# Altium PCB WPT Round 2 TX Layout.PcbDoc (part 2 of 2)
Units mm, origin at the board's own origin, x right, y up, seen from the top; angles counter-clockwise.
Board outline 82 x 80 mm, 4 copper layers (Top Layer, Ground 1, Ground 2, Bottom Layer), stack 0.603 mm thick; 124 components, 48 nets, 304 pads, 238 vias.
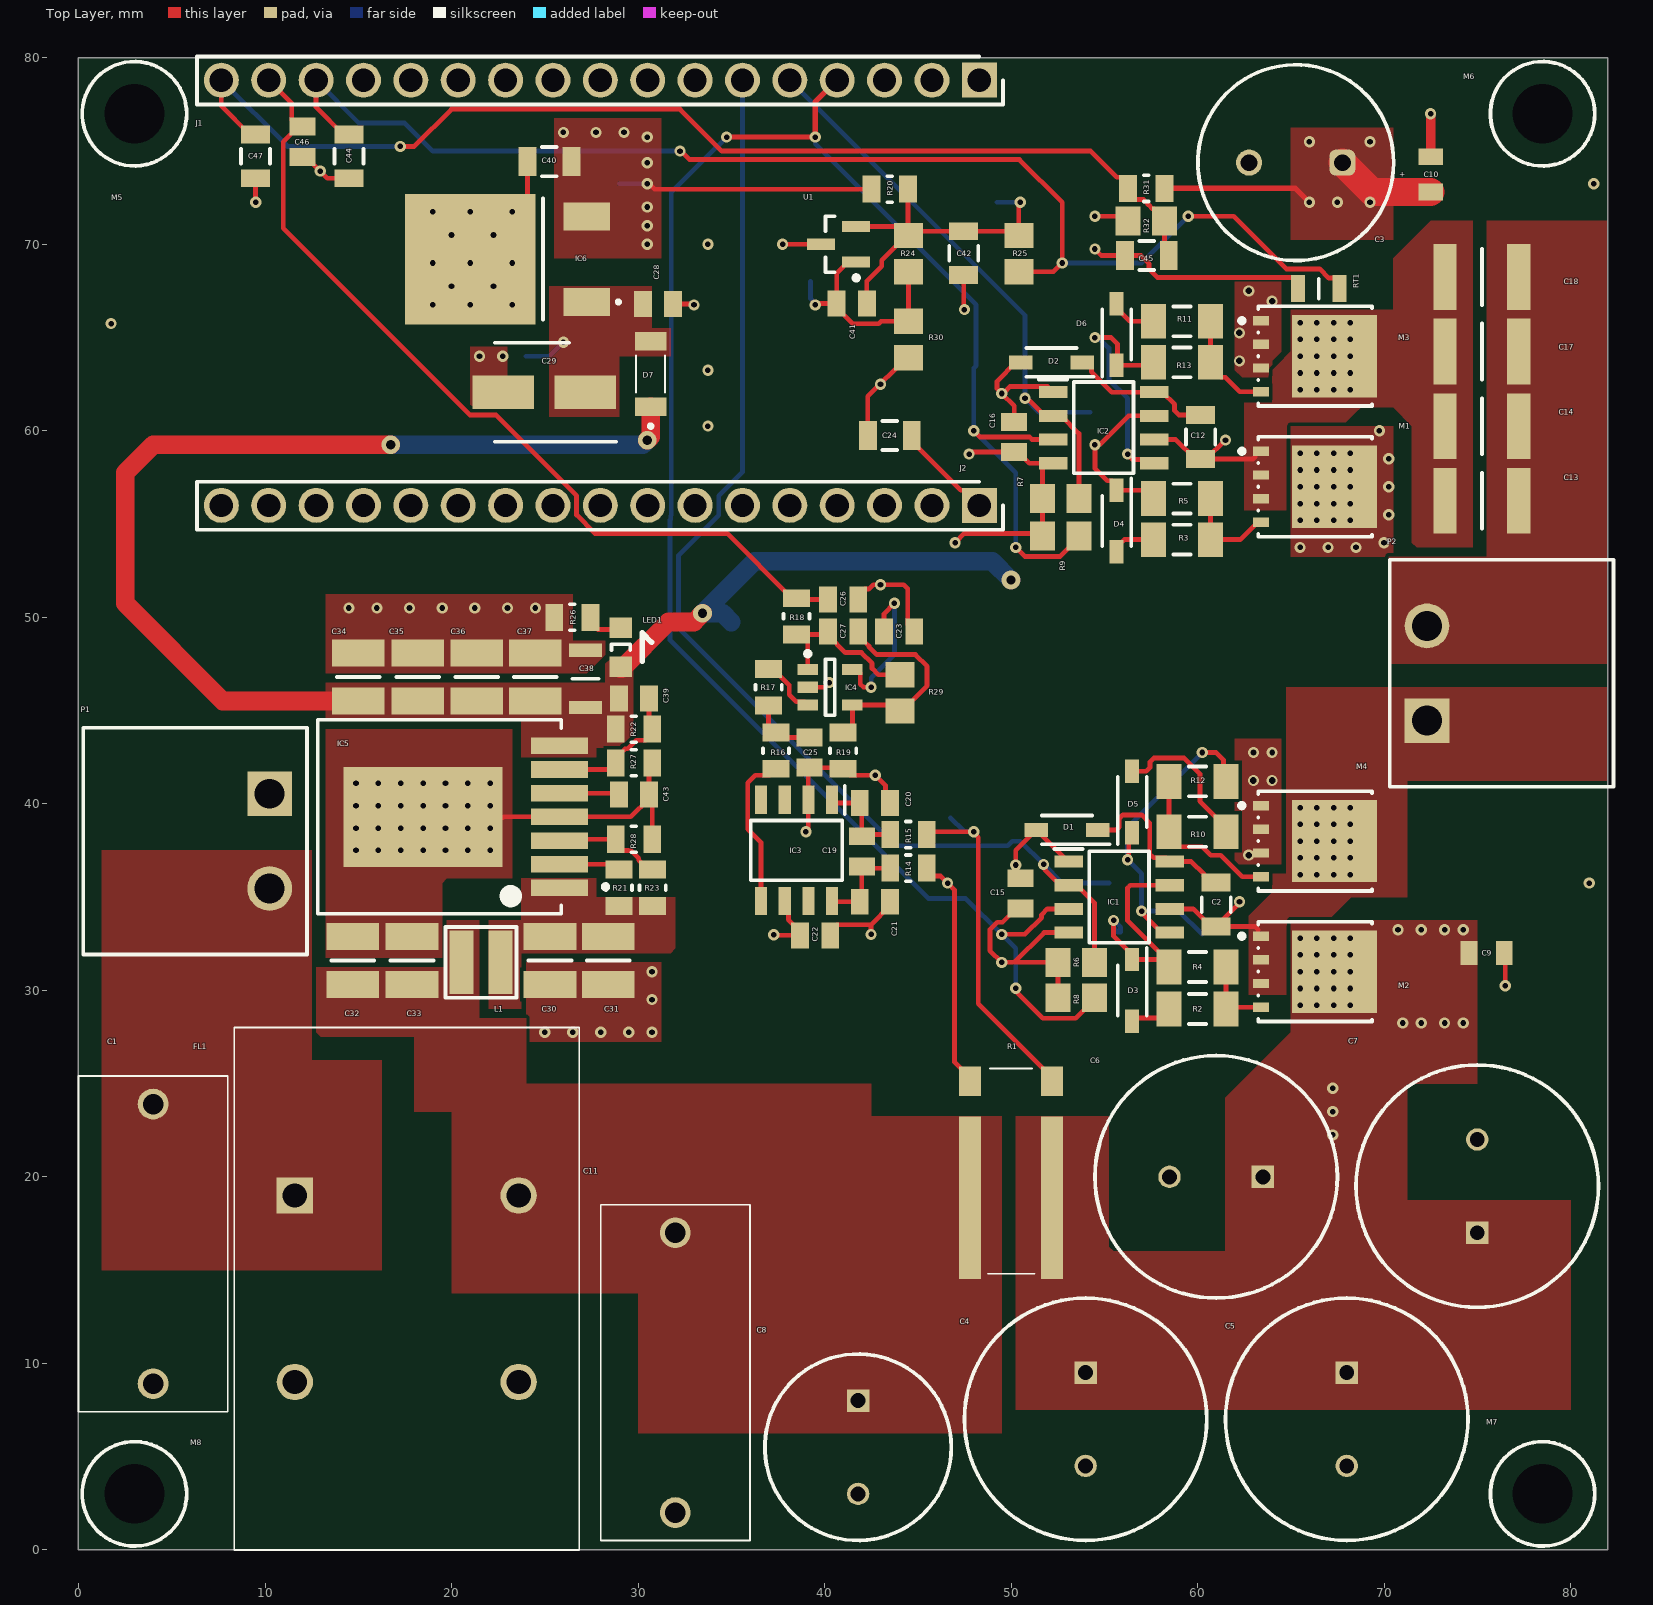
[diagram p0: Top Layer view]

## Polygon pours and split planes (outlines as drawn) (continued)
"Vin -" on Top Layer "VIN_-_L01_P006" (solid, remove dead copper, pour order 6): 65,33.75 75,33.75 75,25 71.25,25 71.25,22.5 61.5,22.5 61.5,24.25 65,27.75
NetC2_1 on Top Layer "NETC2_1_L01_P005" (solid, remove dead copper, pour order 5): 82,46.25 82,41.25 71.25,41.25 71.25,35 64.75,35 64.75,46.25
NetC13_1 on Top Layer "NETC13_1_L01_P004" (solid, remove dead copper, pour order 4): 82,71.25 82,47.5 70.25,47.5 70.25,53.25 75.5,53.25 75.5,71.25
"Vin -" on Top Layer "VIN_-_L01_P002" (solid, remove dead copper, pour order 2): 50.25,23.25 55.25,23.25 55.25,16.25 55.5,16 61.5,16 61.5,22.5 71.25,22.5 71.25,18.75 80,18.75 80,7.5 50.25,7.5
"DCDC Input Unfiltered" on Top Layer "DCDC_INPUT_UNFILTERED_L01_P001" (solid, remove dead copper, pour order 1): 20,25 42.5,25 42.5,23.25 49.5,23.25 49.5,6.25 30,6.25 30,13.75 20,13.75
P+ on Top Layer "P+_L01_P000" (solid, remove dead copper, pour order 0): 1.25,37.5 12.5,37.5 12.5,26.25 16.25,26.25 16.25,15 1.25,15
GND on Bottom Layer "GND_L04_P025" (solid, remove dead copper, pour order 25): 0,80 59.75,80 59.75,68.25 53.25,68.25 53.25,68.19 50.81,65.75 48.5,65.75 48.5,28 40,28 40,0 0,0
GND on Bottom Layer "GND_L04_P024" (solid, remove dead copper, pour order 24): 43.75,0 82,0 82,80 60,80 60,68 53.5,68 51,65.5 48.75,65.5 48.75,57.75 49.75,56.75 49.75,54.75 48.75,53.75 48.75,27.5 43.75,27.5
"Vin -" on Bottom Layer "VIN_-_L04_P012" (solid, remove dead copper, pour order 12): 65,76.25 75,76.25 75,27.5 69.25,27.5 69.25,52.5 65,52.5 65,60.75 71.25,60.75 71.25,68.75 65,68.75
P- on Bottom Layer "P-_L04_P003" (solid, remove dead copper, pour order 3): 0,45 12.5,45 12.5,26.25 16.25,26.25 16.25,0 0,0
5V on Ground 2 (split plane): 59.898,79.49 59.898,68.102 53.5,68.102 53.461,68.094 53.428,68.072 50.942,65.586 48.766,65.586 48.727,65.578 48.694,65.556 48.678,65.54 48.656,65.507 48.648,65.468 48.648,57.75 48.656,57.711 48.678,57.678 49.648,56.708 49.648,54.792 48.678,53.822 48.656,53.789 48.648,53.75 48.648,33.791 48.628,33.762 48.621,33.723 48.628,33.684 48.65,33.65 48.684,33.628 48.723,33.621 52.148,33.621 52.148,28.042 51.708,27.602 43.25,27.602 43.211,27.594 43.178,27.572 43.156,27.539 43.148,27.5 43.148,23.25 43.148,0.51 0.51,0.51 0.51,79.49
GND on Ground 2 (split plane): 23.148,36.602 14.102,36.602 14.102,42.148 23.148,42.148
GND on Ground 2 (split plane): 81.49,79.49 81.49,0.51 43.352,0.51 43.352,23.25 43.352,27.398 51.75,27.398 51.789,27.406 51.822,27.428 52.322,27.928 52.344,27.961 52.352,28 52.352,51.25 52.344,51.289 52.322,51.322 51.102,52.542 51.102,65.406 51.111,65.412 51.133,65.445 51.141,65.484 51.139,65.495 53.542,67.898 60,67.898 60.039,67.906 60.072,67.928 60.094,67.961 60.102,68 60.102,79.49
12V on Ground 2 (split plane): 50.898,52.5 50.906,52.461 50.928,52.428 52.148,51.208 52.148,33.824 48.852,33.824 48.852,53.708 49.822,54.678 49.844,54.711 49.852,54.75 49.852,56.75 49.844,56.789 49.822,56.822 48.852,57.792 48.852,65.382 50.898,65.382
"Vin -" on Ground 2 (split plane): 70.398,62.75 70.398,33.75 70.398,18.352 61.602,18.352 61.602,24.208 65.072,27.678 65.094,27.711 65.102,27.75 65.102,76.148 70.398,76.148
GND on Ground 1 (split plane): 59.898,79.49 59.898,68.102 53.5,68.102 53.461,68.094 53.428,68.072 50.928,65.572 50.906,65.539 50.898,65.5 50.898,52.5 50.906,52.461 50.928,52.428 52.148,51.208 52.148,28.042 51.708,27.602 43.25,27.602 43.211,27.594 43.178,27.572 43.156,27.539 43.148,27.5 43.148,5.102 40.25,5.102 40.211,5.094 40.178,5.072 40.156,5.039 40.148,5 40.156,4.961 40.178,4.928 40.211,4.906 40.25,4.898 43.25,4.898 43.289,4.906 43.322,4.928 43.344,4.961 43.352,5 43.352,27.398 51.75,27.398 51.789,27.406 51.822,27.428 52.322,27.928 52.344,27.961 52.352,28 52.352,51.25 52.344,51.289 52.322,51.322 51.102,52.542 51.102,65.458 53.542,67.898 60,67.898 60.039,67.906 60.072,67.928 60.094,67.961 60.102,68 60.102,79.49 81.49,79.49 81.49,0.51 43.352,0.51 43.352,2 43.344,2.039 43.322,2.072 43.289,2.094 43.25,2.102 40.25,2.102 40.211,2.094 40.178,2.072 40.156,2.039 40.148,2 40.156,1.961 40.178,1.928 40.211,1.906 40.25,1.898 43.148,1.898 43.148,0.51 0.51,0.51 0.51,79.49

## Other copper
Ground 1 (plane layer: these items are gaps in the copper):
  lines w0.2: 40.25,2 43.25,2 43.25,0 ; 40.25,5 40.5,5 43.25,5 43.25,27.5 51.75,27.5 52.25,28 52.25,51.25 51,52.5 51,65.5 53.5,68 60,68 60,80
Ground 2 (plane layer: these items are gaps in the copper):
  lines w0.2: 43.25,0 43.25,23.25 43.25,27.5 51.75,27.5 52.25,28 52.25,51.25 51,52.5 51,65.5 53.5,68 60,68 60,80 ; 48.723,33.723 52.223,33.723 ; 48.75,33.75 48.75,53.75 49.75,54.75 49.75,56.75 48.75,57.75 48.75,65.468 48.766,65.484 51.039,65.484 ; 14,36.5 14,42.25 23.25,42.25 23.25,36.5 14,36.5 ; 61.5,18.25 61.5,24.25 65,27.75 65,76.25 65.5,76.25 70.5,76.25 70.5,62.75 70.5,33.75 70.5,18.25 61.5,18.25

## Silkscreen, mask and mechanical layers (free items; w line width, h text height)
Bottom Overlay:
  text "To WPT Coil" at 76.7,42.95 h0.8 r270
  text "GND" at 6.95,39.45 h0.8 r270
  text "+ve" at 6.95,34.45 h0.8 r270
  text "Input from Power Source" at 2.967,28.95 h0.8 r270
  text "WPT Round 2 TX" at 23.05,2.45 h0.8
  text "AE" at 17.55,0.7 h0.8
Board Layout:
  the board outline again, w0.2

## Text inside footprints (layer, text, board x,y; h text height)
C3: Top Overlay "+" at 70.816,73.629 h0.3